# EAGLE board main (EAGLE 9.1.3)
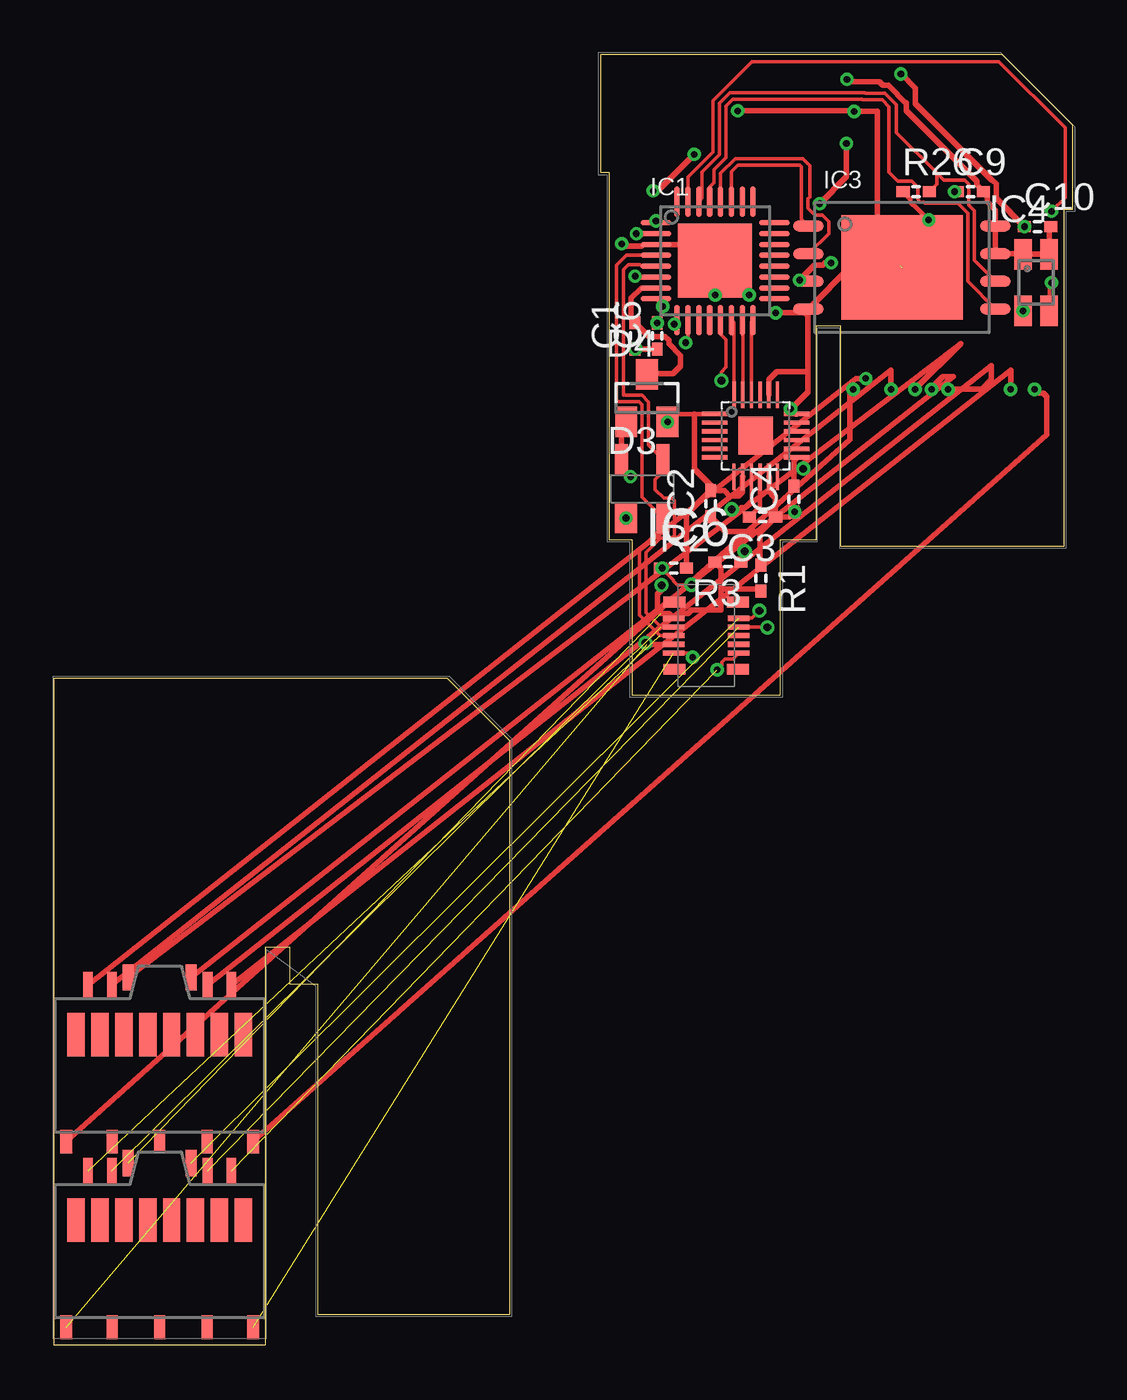
[diagram p0: board, top side]
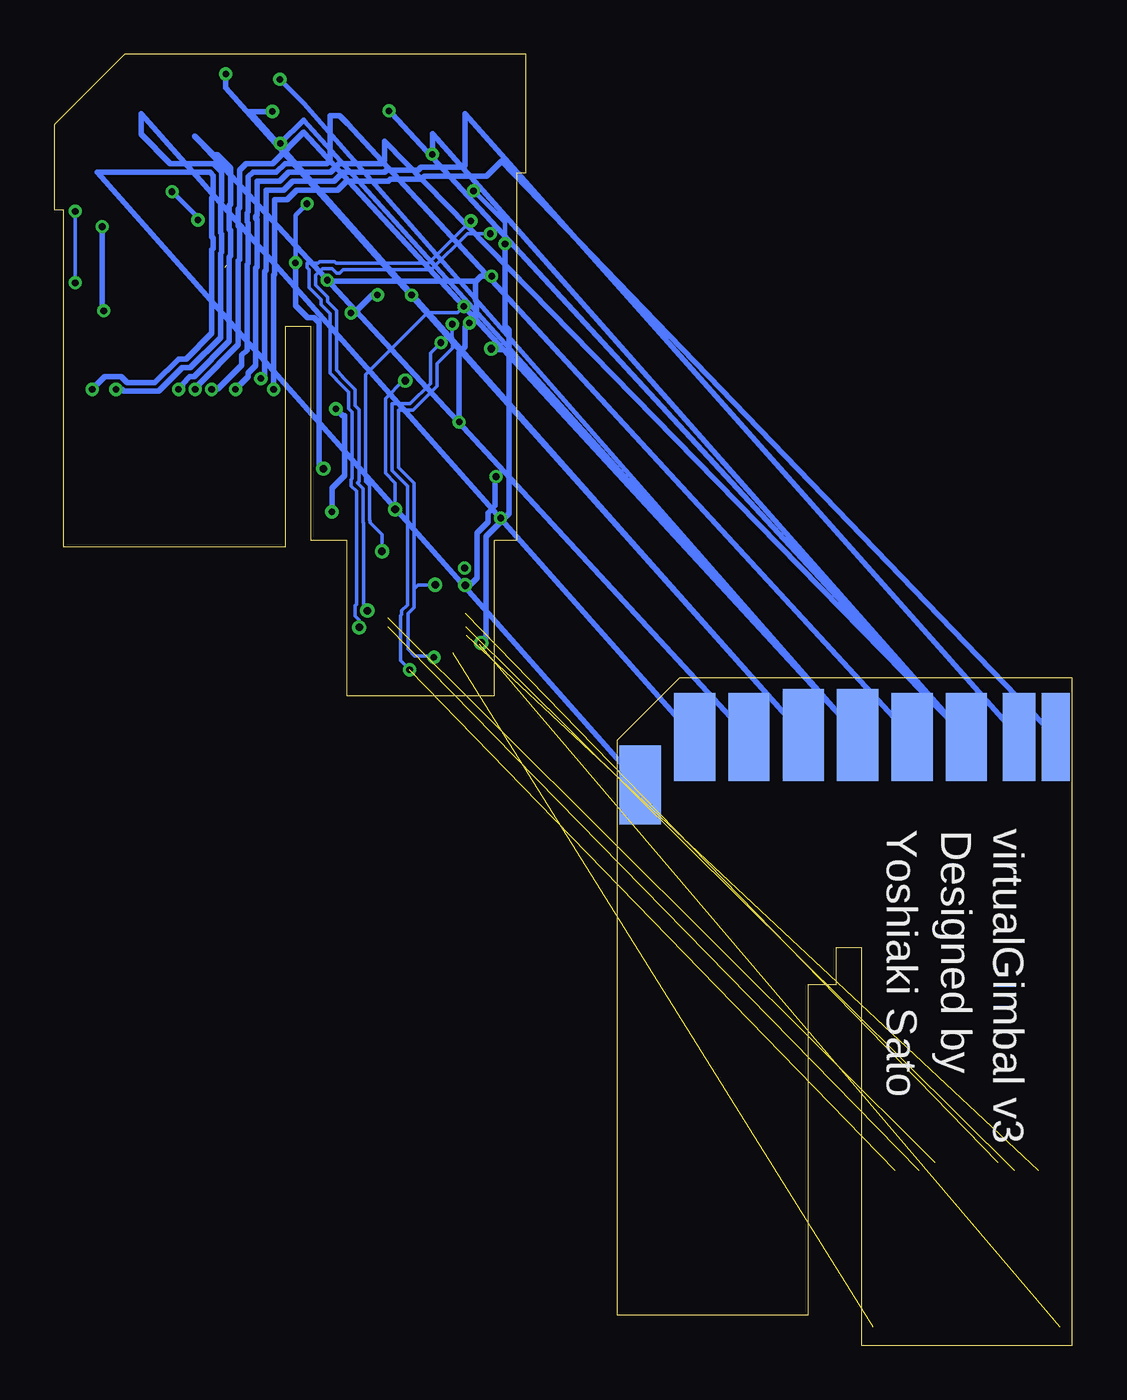
[diagram p1: board, bottom side, seen from below]

Size 46.85 x 59.4 mm. Coordinates in mm from the lower left corner, seen from the top.
Outline: 26.6,29.9 26.6,37.05 25.55,37.05 25.55,53.95 25.15,53.95 25.15,59.4 43.6,59.4 46.85,56.15 46.85,52.25 46.45,52.25 46.45,36.75 36.2,36.75 36.2,46.9 35.05,46.9 35.05,37.05 33.4,37.05 33.4,29.9 26.6,29.9
Outline: 0,0 0,30.7 18.07,30.7 20.95,27.82 20.95,1.4 12.15,1.4 12.15,16.6 10.85,16.6 10.85,18.3 9.7,18.3 9.7,0 0,0
Copper layers (1*16): Top 0.035mm / dielectric 1.5mm / Bottom 0.035mm
Design rules "SeeedStudio_2layer_DRU_no_angle_20140221": minimum track width 6mil, minimum drill 12mil, track to track 6mil, track to pad 6mil, pad to pad 6mil, via to via 6mil, smd to smd 0mil, copper to edge 10mil, drill to drill 10mil, minimum pad ring 10mil, minimum via ring 6mil, stop-mask expansion 2mil, vias tented up to drill 100mil, thermal gap 10mil
Net classes: 0 signal: width 0.152 mm; 1 power: width 0.203 mm
tKeepout: 5 lines

## Footprints (pad centres in the part's own frame; a part is rotated, then mirrored left to right if it is on the bottom)
1005 = smd 0.6 x 0.5: P$1 -0.6,0; P$2 0.6,0
SD_V3 = smd 1.9 x 4.05: !CS!(DAT3) 2.5,2.2; DI(CMD) 5,2.2; SCLK 12.5,2.2; VSS2 15,2.2 | smd 1.5 x 4.05: DO(DAT0) 17.42,2.2 | smd 1.3 x 4.05: RSV(DAT1) 19.12,2.2 | smd 1.9 x 3.65: RSV(DAT2) 0,0 | smd 1.9 x 4.25: VDD 10,2.3; VSS1 7.5,2.3
BLOCK_SD_CONNECTOR = smd 0.55 x 1.1: 1 4.3,-0.43; 8 -4.3,-0.43 | smd 0.45 x 1.2: 2 3.3,6.77; 3 2.2,6.77; 6 -2.2,6.77; 7 -3.3,6.77 | smd 0.5 x 1.2: 4 1.45,7.13; 5 -1.45,7.13 | smd 0.5 x 1.1: 9 -2.18,-0.43; 10 0,-0.43; 11 2.18,-0.43 | smd 0.8 x 2: 12 -3.85,4.5; 13 -2.75,4.5; 14 -1.65,4.5; 15 -0.55,4.5; 16 0.55,4.5; 17 1.65,4.5; 18 2.75,4.5; 19 3.85,4.5
5035481020 = smd 0.24 x 1: 1 0.8,1.5; 2 0.8,-1.5; 3 0.4,1.5; 4 0.4,-1.5; 5 0,1.5; 6 0,-1.5; 7 -0.4,1.5; 8 -0.4,-1.5; 9 -0.8,1.5; 10 -0.8,-1.5 | smd 0.5 x 1: NC1 1.55,1.46; NC2 1.55,-1.46; NC3 -1.55,1.46; NC4 -1.55,-1.46
SOT143 = smd 1 x 1.4: 1 -0.75,-1.35 | smd 0.6 x 1.4: 2 0.95,-1.35; 3 0.95,1.35; 4 -0.95,1.35
SOT23 = smd 1 x 1.4: 1 -0.95,-1.1; 2 0.95,-1.1; 3 0,1.1
QFN32 = smd 1.4 x 0.25: 1 -2.725,1.75; 2 -2.725,1.25; 3 -2.725,0.75; 4 -2.725,0.25; 5 -2.725,-0.25; 6 -2.725,-0.75; 7 -2.725,-1.25; 8 -2.725,-1.75; 17 2.725,-1.75; 18 2.725,-1.25; 19 2.725,-0.75; 20 2.725,-0.25; 21 2.725,0.25; 22 2.725,0.75; 23 2.725,1.25; 24 2.725,1.75 | smd 0.25 x 1.4: 9 -1.75,-2.725; 10 -1.25,-2.725; 11 -0.75,-2.725; 12 -0.25,-2.725; 13 0.25,-2.725; 14 0.75,-2.725; 15 1.25,-2.725; 16 1.75,-2.725; 25 1.75,2.725; 26 1.25,2.725; 27 0.75,2.725; 28 0.25,2.725; 29 -0.25,2.725; 30 -0.75,2.725; 31 -1.25,2.725; 32 -1.75,2.725 | smd 3.4 x 3.4: B 0,0
V-PDFN-8 = smd 1.4 x 0.5: 1 -4.3,1.905; 2 -4.3,0.635; 3 -4.3,-0.635; 4 -4.3,-1.905; 5 4.3,-1.905; 6 4.3,-0.635; 7 4.3,0.635; 8 4.3,1.905 | smd 5.6 x 4.8: B 0,0
KC2016K = smd 1.4 x 0.8: 1 -1.3,-0.6; 2 1.3,-0.6; 3 1.3,0.6; 4 -1.3,0.6
QFN-24 = smd 1.22 x 0.2: 1 -1.89,1; 2 -1.89,0.6; 3 -1.89,0.2; 4 -1.89,-0.2; 5 -1.89,-0.6; 6 -1.89,-1; 13 1.89,-1; 14 1.89,-0.6; 15 1.89,-0.2; 16 1.89,0.2; 17 1.89,0.6; 18 1.89,1 | smd 0.2 x 1.22: 7 -1,-1.89; 8 -0.6,-1.89; 9 -0.2,-1.89; 10 0.2,-1.89; 11 0.6,-1.89; 12 1,-1.89; 19 1,1.89; 20 0.6,1.89; 21 0.2,1.89; 22 -0.2,1.89; 23 -0.6,1.89; 24 -1,1.89 | smd 1.59 x 1.75: B 0,0

## Placement (x,y rotation side)
C1  1.0u  [1005]  26.73,46.45 90 top
C2  10n  [1005]  30.2,38.72 90 top
C3  0.1u  [1005]  32.6,38.11 180 top
C4  0.1u  [1005]  34.04,38.93 90 top
C6  1.0u  [1005]  27.75,46.44 90 top
C9  0.1u  [1005]  42.16,53.08 0 top
C10  0.1u  [1005]  45.25,51.47 0 top
CN1  SD  [SD_V3]  19.88,25.78 0 bottom
CN2  [BLOCK_SD_CONNECTOR]  4.85,1.25 0 top
CN3  [BLOCK_SD_CONNECTOR]  4.85,9.8 0 top
CN4  5035481020  [5035481020]  30,32.65 90 top
D3  SP0503BAH  [SOT143]  27.06,39.41 0 top
D4  BAT54CL  [SOT23]  27.27,43.58 0 top
IC1  C8051F381-GM  [QFN32]  30.41,49.9 0 top
IC3  MT29F2G01ABAGDWB  [V-PDFN-8]  39.01,49.59 0 top
IC4  KC2016K48.0000C1GE00  [KC2016K]  45.18,48.9 270 top
IC6  MPU-9250  [QFN-24]  32.28,41.85 0 top
R1  10k  [1005]  32.52,35.29 270 top
R2  1k  [1005]  28.5,35.76 0 top
R3  100  [1005]  31,36.04 180 top
R26  1k  [1005]  39.66,53.08 0 top

## Library data of the parts
C1-C4 C6 C9 C10 R1-R3 R26 = reg,cap
CN1-CN4 = Connector
D3 = diode
D4 = avago
IC1 = C8051F34x
IC3 = EEPROM
IC4 = Oscillator
IC6 = GYRO

## Nets
+3V3 [power]: C2.P$2 C4.P$2 C6.P$2 C9.P$2 C10.P$2 CN1.VDD CN3.4 D4.2 IC1.6 IC3.3 IC3.7 IC3.8 IC4.1 IC4.4 IC6.1 IC6.8 IC6.13 R2.P$2
C2CK: CN2.1 CN4.9 IC1.9 R2.P$1
C2D: CN2.2 CN4.10 IC1.10
D+: CN2.7 CN4.5 D3.2 IC1.4
D-: CN2.6 CN4.3 D3.3 IC1.5
DGND [power]: C1.P$1 C2.P$1 C3.P$1 C4.P$1 C6.P$1 C9.P$1 C10.P$1 CN1.VSS1 CN1.VSS2 CN2.8 CN3.6 CN4.7 D3.1 IC1.3 IC1.B IC3.4 IC3.B IC4.2 IC6.11 IC6.18 IC6.20 R1.P$1 R26.P$1
EEPROM_!CS: IC1.27 IC3.1
EEPROM_MISO: IC1.28 IC3.2
EEPROM_MOSI: IC1.29 IC3.5
EEPROM_SCK: IC1.30 IC3.6 R26.P$2
IMU_!CS: IC1.16 IC6.22
IMU_MISO: IC1.13 IC6.9
IMU_MOSI: IC1.14 IC6.24
IMU_SCK: IC1.15 IC6.23
N$1 [power]: C1.P$2 D4.3 IC1.7
N$2: CN1.RSV(DAT1) CN3.8
N$3: CN1.DO(DAT0) CN3.7
N$4: IC1.8 R3.P$1
N$6: CN1.SCLK CN3.5
N$10: CN1.DI(CMD) CN3.3
N$11: IC1.31 IC4.3
N$12: CN1.!CS!(DAT3) CN3.2
N$13: C3.P$2 IC6.10
N$14: CN1.RSV(DAT2) CN3.1
RX1: CN2.3 CN4.4 IC1.1
TX1: CN2.4 CN4.2 IC1.2
VBUS [power]: CN2.5 CN4.1 D3.4 D4.1 R1.P$2 R3.P$2

## Tracks (layer width: path | path; a pad name or v marks a point on that pad's centre or on a via)
+3V3  (via drill 0.3, 0.35)
  Top 0.203: IC3.3 34.66,49.01 v34.29,49.01 | IC6.1 29.45,42.85 28.59,42.85 D4.2
  Top 0.254: v40.37,43.99 40.55,44.16 40.55,44.23 40.89,44.57 41.37,44.57 CN3.4 | C10.P$2 45.78,51.4 IC4.4 IC4.1 44.55,50.22 IC3.7 IC3.8 43.31,52.23 42.93,52.61 42.93,52.91 C9.P$2 42.44,53.4 42.44,53.57 39.22,56.8 39.22,57.13 | v35.22,52.53 36.45,53.76 v36.45,55.3 | 39.22,57.13 39.22,57.18 | 39.22,57.13 38.38,57.97 38.14,57.97 37.96,58.15 36.57,58.15 v36.47,58.25 | IC1.6 26.77,49.15 v26.72,49.2 | v35.75,49.81 35.49,49.81 35.38,49.7 34.98,49.7 v34.29,49.01 | 34.04,40.3 34.04,40.71 IC6.13 | 34.04,40.3 C4.P$2 | IC6.8 31.66,39.94 31.66,39.25 31.48,39.07 31.08,39.07 30.83,39.32 30.45,39.32 | 30.45,39.32 C2.P$2 29.1,38.21 R2.P$2 | 29.45,42.85 29.45,40.32 30.45,39.32 | v34.47,40.33 34.43,40.3 34.04,40.3
  Bottom 0.203: v36.47,58.25 35.38,57.16 CN1.VDD 35.38,56.37 | v35.75,49.81 35.75,52 35.41,52.34
  Bottom 0.254: v40.37,43.99 40.19,44.16 40.19,44.23 38.39,46.03 38.39,49.9 38.33,49.96 38.33,51.46 38.39,51.52 38.39,52.27 38.33,52.33 38.33,54.06 38.01,54.38 36.81,54.38 35.38,55.81 CN1.VDD | 35.41,52.34 v35.22,52.53 | v36.45,55.3 35.38,56.37 | 27.45,48.95 27.21,49.2 v26.72,49.2 | v34.29,49.01 34.24,48.95 27.45,48.95 | v35.75,49.81 35.75,47.84 35.19,47.28 34.89,47.28 34.67,47.06 34.67,40.53 v34.47,40.33 | 27.45,48.95 27.47,48.94 27.47,48.1 27.42,48.04 27.42,47.56 27.47,47.51 27.47,47.32 C6.P$2 27.95,46.84 27.95,45.95 28.22,45.68 D4.2
  other vias: 27.75,47.04 28.22,42.48
C2CK  (via drill 0.3, 0.35)  (1 unrouted)
  Top 0.152: CN4.9 29.19,31.85 v29.38,31.66 | v28.54,46.98 28.66,47.11 IC1.9 | v27.97,35.76 R2.P$1 28.13,35.53 28.18,35.53 28.5,35.21 28.5,35.16 28.68,34.98 v29.32,34.98
  Bottom 0.152: v29.38,31.66 29.44,31.72 30.26,31.72 30.57,32.03 30.57,33.44 30.57,33.45 30.57,33.67 30.3,33.94 30.3,34.8 | v27.97,35.76 27.78,35.76 | v28.54,46.98 28.54,46.37 28.52,46.36 28.52,45.88 29.24,45.16 29.24,44.13 30.34,43.02 31.01,43.02 31.01,40.37 30.3,39.67 30.3,34.8 | 30.3,34.8 30.11,34.98 v29.32,34.98
C2D  (via drill 0.3)  (1 unrouted)
  Top 0.152: CN4.10 31.23,31.58 30.86,31.58 30.73,31.45 30.73,31.3 v30.5,31.07 | IC1.10 29.16,46.24 v29.06,46.13
  Bottom 0.152: v29.06,46.13 29.55,45.64 29.55,44.25 30.47,43.33 31.31,43.33 31.31,40.25 30.6,39.54 30.6,34.07 30.87,33.8 30.87,33.63 30.93,33.57 30.93,31.5 v30.5,31.07
D+  (1 unrouted)
  Top 0.152: IC1.4 26.32,50.15 25.88,49.7 25.88,43.41 26.91,43.41 27.05,43.27 27.05,40.2 27.05,40.19 27.05,39.75 27.05,39.74 27.05,39.02 D3.2 28.01,37.68 26.93,36.6 26.93,33.59 27.88,32.65 CN4.5
D-  (1 unrouted)
  Top 0.152: IC1.5 27.02,49.65 26.95,49.73 26.42,49.73 26.18,49.49 26.18,43.71 27.04,43.71 27.35,43.4 27.35,41.42 D3.3 28.01,40.18 27.65,39.82 27.65,39.38 28.04,38.99 28.4,38.99 28.54,38.85 28.54,37.27 28.4,37.13 27.9,37.13 27.23,36.47 27.23,33.72 27.91,33.05 CN4.3
DGND  (via drill 0.3, 0.35)  (2 unrouted)
  Top 0.203: 40.13,50.71 40.24,50.82 v40.24,51.78 39.75,52.27 39.73,52.27 39.4,52.6 39.4,52.74 R26.P$1 | C1.P$1 v26.74,45.86
  Top 0.254: CN3.6 38.51,44.86 v38.51,43.99 | IC4.2 44.42,47.6 | 38.94,49.66 37.88,50.72 37.88,56.77 v36.81,56.77 36.79,56.8 v31.45,56.8 | 40.13,50.71 39.09,49.66 IC3.B | C10.P$1 43.34,52.78 43.34,53.45 43.18,53.61 43.14,53.61 39.63,57.12 39.63,57.85 38.98,58.5 v38.96,58.5 | v29.45,54.8 27.77,53.12 v27.56,53.12 | 34.53,47.51 v33.2,47.51 | C1.P$1 C6.P$1 | v30.41,48.32 IC1.B | 34.67,47.64 IC3.4 34.53,47.51 | 34.67,44.8 33.25,44.8 32.88,44.43 IC6.20 | C3.P$1 33.2,39.07 33.08,39.07 32.9,39.25 32.9,39.94 IC6.11 | C3.P$1 33.82,38.11 C4.P$1 34.06,38.33 v34.08,38.35 | 27.11,50.65 27.03,50.57 26.23,50.57 v26.11,50.68 | IC1.3 29.66,50.65 IC1.B | IC1.B v31.98,48.33 | C2.P$1 30.88,37.44 32.47,37.44 | R1.P$1 32.47,35.94 32.47,37.44 | 32.47,37.44 32.52,37.44 C3.P$1 | C9.P$1 v41.43,53.08 | IC6.18 34.12,42.85 v33.89,43.08 34.67,43.86 34.67,44.8 | CN4.7 27.27,32.25 v27.2,32.31 | 34.67,44.8 | 34.67,44.8 34.67,47.37 34.53,47.51
  Top 0.305: IC3.4 36.69,49.66 38.94,49.66
  Bottom 0.203: v41.43,53.08 40.24,51.89 v40.24,51.78 | v26.74,45.86 26.68,45.8 25.93,45.8 | v26.11,50.68 26.11,51.67 v27.56,53.12
  Bottom 0.254: v38.51,43.99 37.93,44.57 37.93,44.72 37.58,45.07 37.58,49.56 37.51,49.63 37.51,51.79 37.58,51.86 37.58,51.93 37.51,52 37.51,53.56 36.48,53.56 36.07,53.97 34.15,53.97 33.74,54.38 31.81,54.38 31.65,54.54 31.65,55.41 CN1.VSS2 | v38.96,58.5 38.96,57.86 CN1.VSS1 37.86,56.76 36.83,56.76 v36.81,56.77 | C10.P$1 44.65,47.67 IC4.2 | 26.31,37.88 D3.1 | CN1.VSS2 29.45,55.75 v29.45,54.8 | CN1.VSS2 31.33,56.68 v31.45,56.8 | 26.11,50.65 v26.11,50.68 | 26.11,50.65 26.11,46.88 25.93,46.71 25.93,45.8 25.93,38.26 26.31,37.88 | 26.12,50.63 26.12,50.64 26.11,50.65 | 30.44,48.29 30.44,48.3 v30.41,48.32 | v31.98,48.33 32.21,48.33 33.03,47.51 v33.2,47.51 | 26.31,37.88 26.98,37.21 26.98,32.54 v27.2,32.31 | v34.08,38.35 34.08,39.44 33.5,40.02 33.5,42.78 33.59,42.78 v33.89,43.08
  other vias: 44.65,51.47 44.58,47.6 26.31,38.06
EEPROM_!CS
  Top 0.152: IC1.27 31.16,53.99 31.47,54.29 34.31,54.29 34.39,54.22 34.39,52.88 34.38,52.88 34.38,51.82 IC3.1
EEPROM_MISO
  Top 0.152: IC3.2 35.64,51.15 35.64,51.69 35.34,52 35,52 34.69,52.31 34.69,52.75 34.76,52.82 34.76,54.28 34.44,54.6 31.34,54.6 30.66,53.92 IC1.28
EEPROM_MOSI
  Top 0.152: IC3.5 42.04,48.96 42.04,52.08 41.58,52.55 40.06,52.55 40.01,52.6 39.87,52.6 39.73,52.73 39.73,53.28 39.46,53.56 38.83,53.56 38.41,53.97 38.41,57 38.1,57.31 37.19,57.31 37.17,57.33 31.23,57.33 30.92,57.02 30.92,54.65 30.36,54.09 30.36,53.49 30.16,53.3 IC1.29
EEPROM_SCK
  Top 0.152: IC3.6 42.34,49.92 42.34,52.21 42.09,52.47 42.09,53.42 41.9,53.61 40.94,53.61 40.6,53.95 | R26.P$2 40.6,53.42 40.6,53.95 | 40.6,53.95 38.76,55.8 38.76,57.09 38.23,57.62 37.32,57.62 37.3,57.64 31.1,57.64 30.61,57.15 30.61,54.78 29.81,53.97 29.81,52.77 IC1.30
IMU_!CS
  Top 0.152: IC6.22 32.08,47.09 IC1.16
IMU_MISO  (via drill 0.35)
  Top 0.152: v30.7,44.38 30.7,44.78 30.91,45 30.91,46.28 30.66,46.53 IC1.13 | IC6.9 32.08,38.91 31.76,38.59 31.6,38.59 31.47,38.46 v31.17,38.46
  Bottom 0.152: v31.17,38.46 v31.18,38.46 31.18,39.68 31.61,40.12 31.61,43.56 30.79,44.38 v30.7,44.38
IMU_MOSI
  Top 0.152: IC6.24 31.28,47.05 IC1.14
IMU_SCK
  Top 0.152: IC6.23 31.68,47.15 IC1.15
N$1
  Top 0.254: IC1.7 27.01,48.65 26.54,48.18 26.54,47.23 C1.P$2 27.35,46.42 28.11,46.42 28.27,46.26 28.27,46.08 28.81,45.54 28.81,45.06 28.47,44.72 28.13,44.72 28.12,44.71 27.3,44.71 D4.3
N$2  (via drill 0.3)
  Top 0.254: CN3.8 36.62,41.67 36.62,43.85 v36.76,43.99
  Bottom 0.254: CN1.RSV(DAT1) 26.26,54.49 26.95,53.8 29.8,53.8 29.95,53.65 31.39,53.65 31.48,53.56 33.4,53.56 33.81,53.16 35.71,53.16 36.14,52.72 36.7,52.72 36.7,49.29 36.76,49.23 v36.76,43.99
N$3  (via drill 0.3)
  Top 0.254: CN3.7 36.89,44.48 v37.34,44.48
  Bottom 0.254: v37.34,44.48 37.17,44.66 37.17,49.4 37.11,49.46 37.11,53.14 36.3,53.14 35.88,53.56 33.98,53.56 33.57,53.97 31.65,53.97 31.56,54.06 30.12,54.06 29.97,54.21 28.04,54.21 27.95,54.3 27.95,56.67 CN1.DO(DAT0)
N$4  (via drill 0.3, 0.35)
  Top 0.152: IC1.8 28,47.83 v28,47.8 | R3.P$1 31.6,36.36 v31.77,36.53
  Bottom 0.152: v31.77,36.53 31.77,37.3 32.32,37.84 32.32,37.96 32.34,37.98 32.34,39.55 32.53,39.74 32.53,44.66 29.67,47.52 28.29,47.52 v28,47.8
N$6  (via drill 0.3)
  Top 0.254: CN3.5 41.72,46.09 v39.61,43.99
  Bottom 0.254: v39.61,43.99 39.34,43.99 38.22,45.1 38.22,45.56 37.98,45.8 37.98,49.73 37.92,49.79 37.92,51.62 37.98,51.69 37.98,52.1 37.92,52.16 37.92,53.76 37.71,53.97 36.65,53.97 36.24,54.38 34.31,54.38 34.15,54.54 34.15,56.58 33.73,56.58 33.36,56.2 CN1.SCLK
N$10  (via drill 0.3)
  Top 0.254: CN3.3 43.13,45.08 43.13,44.44 42.67,43.99 v41.13,43.99
  Bottom 0.254: CN1.DI(CMD) 40.38,55.63 39.53,54.78 39.35,54.78 38.73,54.16 38.73,52.5 38.8,52.44 38.8,51.35 38.73,51.29 38.73,50.13 38.8,50.07 38.8,46.2 40.43,44.57 40.61,44.57 40.96,44.23 40.96,44.16 v41.13,43.99
N$11  (via drill 0.3)
  Top 0.152: IC4.3 45.78,48.78 v45.89,48.89 | v45.89,52.18 46.52,52.81 46.52,56.01 43.46,59.07 32.1,59.07 30.31,57.27 30.31,54.9 29.16,53.76 IC1.31
  Bottom 0.152: v45.89,48.89 v45.89,52.18
N$12  (via drill 0.3)
  Top 0.254: CN3.2 44.01,44.86 v44.01,43.99
  Bottom 0.254: CN1.!CS!(DAT3) 42.86,56.66 42.86,55.72 41.52,54.38 39.52,54.38 39.14,53.99 39.14,52.67 39.2,52.61 39.2,51.18 39.14,51.12 39.14,50.3 39.2,50.24 39.2,46.37 40.59,44.98 40.97,44.98 42.05,43.89 43.66,43.89 43.76,43.99 v44.01,43.99
N$13
  Top 0.203: IC6.10 32.48,38.6 C3.P$2
N$14  (via drill 0.3)
  Top 0.254: CN3.1 45.68,41.9 45.68,43.65 45.52,43.81 45.29,43.81 v45.11,43.99
  Bottom 0.254: v45.11,43.99 44.53,44.57 43.77,44.57 43.5,44.3 42.22,44.3 41.14,45.38 40.79,45.38 39.61,46.56 39.61,50.4 39.55,50.47 39.55,50.95 39.61,51.02 39.61,52.77 39.55,52.84 39.55,53.83 39.69,53.97 44.87,53.97 CN1.RSV(DAT2)
RX1  (via drill 0.3, 0.35)  (1 unrouted)
  Top 0.152: IC1.1 v27.68,51.73 | CN4.4 32.8,33.05 v32.82,33.03
  Bottom 0.152: v27.68,51.73 29.63,49.78 33.88,49.78 33.95,49.85 34.64,49.85 34.7,49.78 35.22,49.78 35.22,49.59 35.13,49.5 35.13,48.66 34.58,48.11 34.58,47.88 34.17,47.48 34.17,44.74 33.88,44.45 33.88,44.42 33.3,43.85 33.3,43.1 33.14,42.93 33.14,39.87 33.19,39.82 33.19,39.54 32.95,39.3 32.95,34.09 33.01,34.03 33.01,33.56 32.82,33.37 v32.82,33.03
TX1  (via drill 0.3, 0.35)  (1 unrouted)
  Top 0.152: IC1.2 v26.79,51.15 | v32.45,33.8 32.1,33.45 CN4.2
  Bottom 0.152: v26.79,51.15 27.84,51.15 29.51,49.48 33.56,49.48 33.71,49.33 33.86,49.33 34.07,49.54 34.51,49.54 34.83,49.23 34.83,48.79 34.27,48.23 34.27,48.01 33.86,47.6 33.86,44.87 33.58,44.58 33.58,44.55 33,43.97 33,43.22 32.84,43.06 32.84,39.75 32.89,39.7 32.89,39.67 32.64,39.42 32.64,37.85 32.62,37.83 32.62,33.97 v32.45,33.8
VBUS  (via drill 0.3, 0.35)  (1 unrouted)
  Top 0.254: v26.52,39.97 26.11,40.38 D3.4 26.11,42.27 D4.1 | R3.P$2 30.68,35.76 30.68,34.8 | 30.68,34.8 30.68,33.83 29.32,33.83 29.16,33.67 28.72,33.67 CN4.1 28.28,33.67 27.92,33.67 27.76,33.83 27.76,34.57 27.95,34.75 v27.95,34.97 | R1.P$2 32.42,34.8 30.68,34.8
  Bottom 0.254: v26.52,39.97 26.57,39.92 26.57,38.63 26.89,38.3 26.89,37.87 27.39,37.38 27.39,35.3 27.71,34.97 v27.95,34.97

## Text on the board
bNames: virtualGimbal v3 | Designed by | Yoshiaki Sato